# EAGLE board ScoreBoard-V2 (EAGLE 9.4.2)
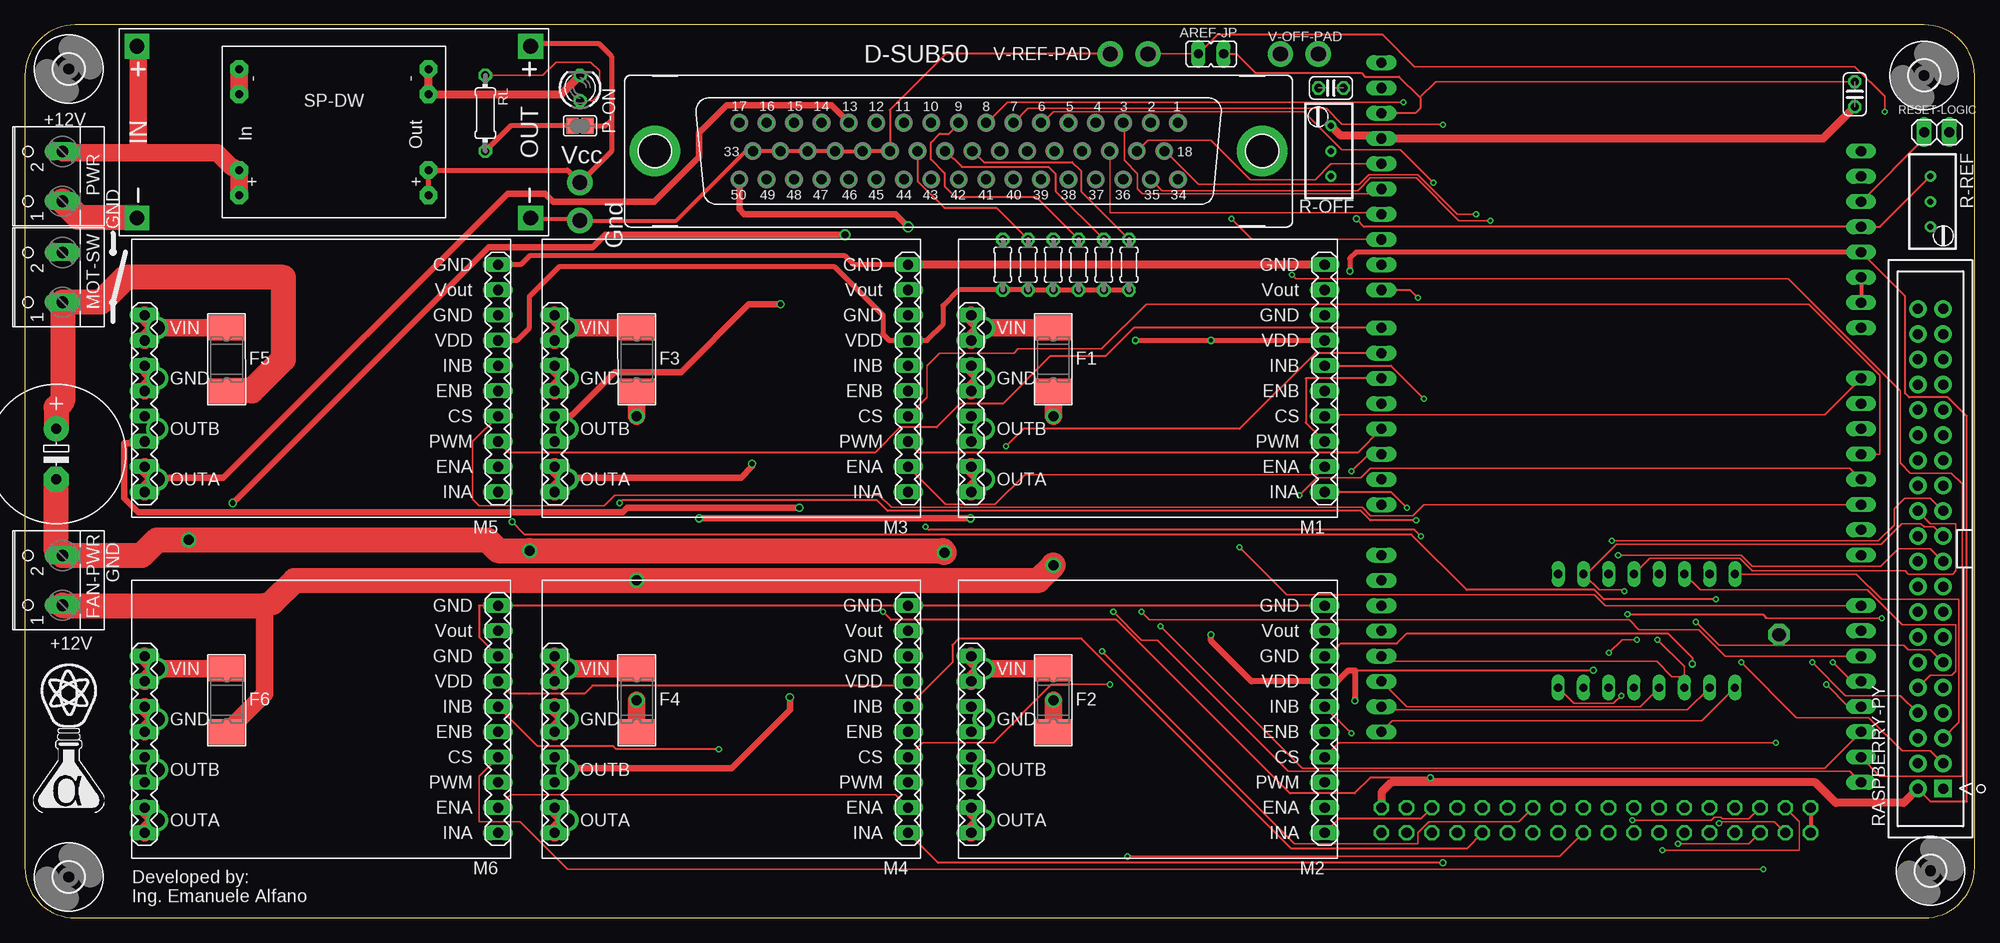
[diagram p0: board, top side]
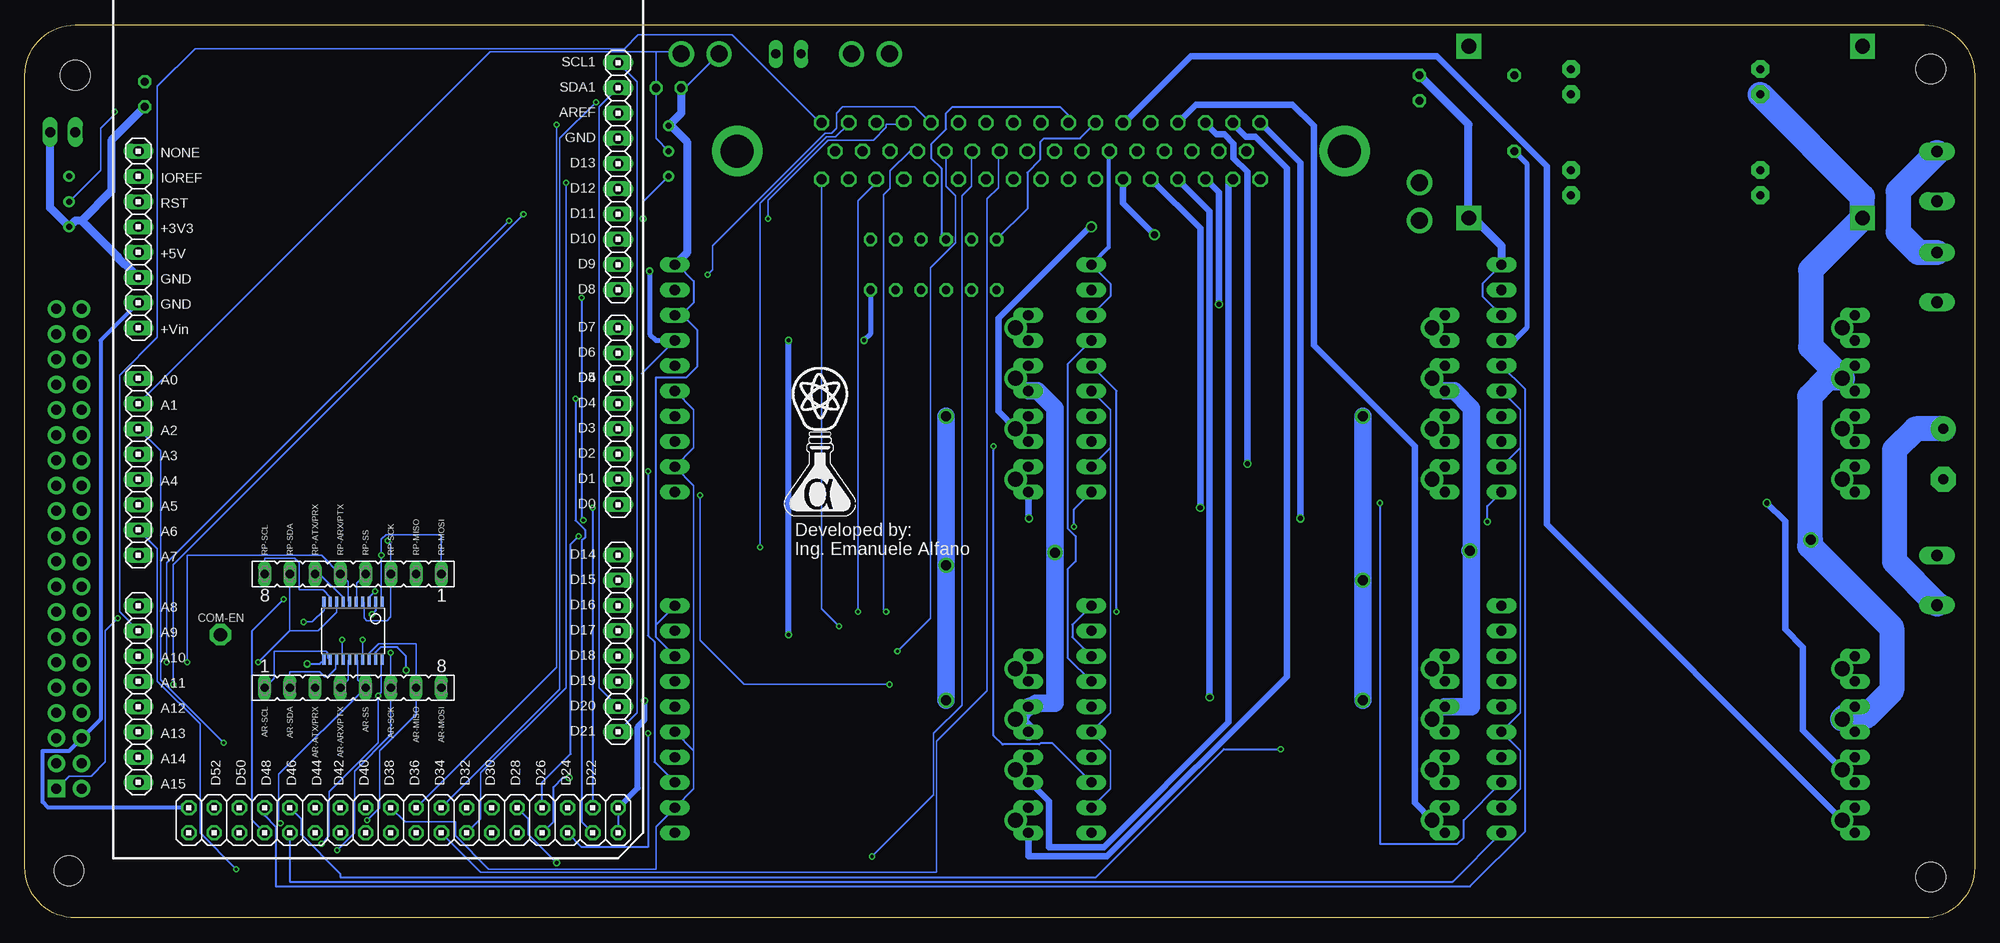
[diagram p1: board, bottom side, seen from below]

Size 196.19 x 89.84 mm. Coordinates in mm from the lower left corner, seen from the top.
Outline: 5.08,0 191.11,0 arc90 196.19,5.08 196.19,84.76 arc90 191.11,89.84 5.08,89.84 arc90 0,84.76 0,5.08 arc90 5.08,0
Copper layers (1*16): Top 0.035mm / dielectric 1.5mm / Bottom 0.035mm
Design rules "SeeedStudio_2layer_DRU_no_angle_20140221": minimum track width 6mil, minimum drill 12mil, track to track 6mil, track to pad 6mil, pad to pad 6mil, via to via 6mil, smd to smd 0mil, copper to edge 10mil, drill to drill 10mil, minimum pad ring 10mil, minimum via ring 6mil, stop-mask expansion 2mil, vias tented up to drill 100mil, thermal gap 10mil
Net classes: 1 PowerJack: width 1.778 mm, drill 1.016 mm, clearance 0.254 mm; 2 PMot: width 0.635 mm, drill 0.508 mm, clearance 0.203 mm; 3 PLogic: width 0.203 mm, drill 0.406 mm, clearance 0.152 mm; 4 Logic: width 0.152 mm

## Footprints (pad centres in the part's own frame; a part is rotated, then mirrored left to right if it is on the bottom)
MEGA-NO-HOLE = drill 1.016 long: +3V3 35.56,2.54; +5V2 38.1,2.54; A0 50.8,2.54; A1 53.34,2.54; A2 55.88,2.54; A3 58.42,2.54; A4 60.96,2.54; A5 63.5,2.54; A6 66.04,2.54; A7 68.58,2.54; A8 73.66,2.54; A9 76.2,2.54; A10 78.74,2.54; A11 81.28,2.54; A12 83.82,2.54; A13 86.36,2.54; A14 88.9,2.54; A15 91.44,2.54; AREF 24.13,50.8; D0 63.5,50.8; D1 60.96,50.8; D2 58.42,50.8; D3 55.88,50.8; D4 53.34,50.8; D5 50.8,50.8; D6 48.26,50.8; D7 45.72,50.8; D8 41.91,50.8; D9 39.37,50.8; D10 36.83,50.8; D11 34.29,50.8; D12 31.75,50.8; D13 29.21,50.8; D14 68.58,50.8; D15 71.12,50.8; D16 73.66,50.8; D17 76.2,50.8; D18 78.74,50.8; D19 81.28,50.8; D20 83.82,50.8; D21 86.36,50.8; GND 26.67,50.8; GND3 40.64,2.54; GND4 43.18,2.54; IOREF 30.48,2.54; NONE 27.94,2.54; RST 33.02,2.54; SCL1 19.05,50.8; SDA1 21.59,50.8; VIN 45.72,2.54 | drill 1.016 octagon: +5V 93.98,50.8; +5V1 96.52,50.8; D22 93.98,48.26; D23 96.52,48.26; D24 93.98,45.72; D25 96.52,45.72; D26 93.98,43.18; D27 96.52,43.18; D28 93.98,40.64; D29 96.52,40.64; D30 93.98,38.1; D31 96.52,38.1; D32 93.98,35.56; D33 96.52,35.56; D34 93.98,33.02; D35 96.52,33.02; D36 93.98,30.48; D37 96.52,30.48; D38 93.98,27.94; D39 96.52,27.94; D40 93.98,25.4; D41 96.52,25.4; D42 93.98,22.86; D43 96.52,22.86; D44 93.98,20.32; D45 96.52,20.32; D46 93.98,17.78; D47 96.52,17.78; D48 93.98,15.24; D49 96.52,15.24; D50 93.98,12.7; D51 96.52,12.7; D52 93.98,10.16; D53 96.52,10.16; GND1 96.52,7.62; GND2 93.98,7.62
JP1 = drill 0.914 long: 1 0,-1.27; 2 0,1.27
E5-13 = drill 1.016 pad 2.54: + -2.54,0 | drill 1.016 pad 2.54 octagon: - 2.54,0
C025-024X044 = drill 0.813 octagon: 1 -1.27,0; 2 1.27,0
P1-13 = drill 1.321 pad 2.159 octagon: TP 0,0
F50VP = drill 1.016 octagon: 1 -22.073,-2.845; 2 -19.329,-2.845; 3 -16.561,-2.845; 4 -13.792,-2.845; 5 -11.049,-2.845; 6 -8.28,-2.845; 7 -5.512,-2.845; 8 -2.769,-2.845; 9 0,-2.845; 10 2.769,-2.845; 11 5.512,-2.845; 12 8.28,-2.845; 13 11.049,-2.845; 14 13.792,-2.845; 15 16.561,-2.845; 16 19.329,-2.845; 17 22.073,-2.845; 18 -20.701,0; 19 -17.932,0; 20 -15.189,0; 21 -12.421,0; 22 -9.652,0; 23 -6.909,0; 24 -4.14,0; 25 -1.372,0; 26 1.372,0; 27 4.14,0; 28 6.909,0; 29 9.652,0; 30 12.421,0; 31 15.189,0; 32 17.932,0; 33 20.701,0; 34 -22.073,2.845; 35 -19.329,2.845; 36 -16.561,2.845; 37 -13.792,2.845; 38 -11.049,2.845; 39 -8.28,2.845; 40 -5.512,2.845; 41 -2.769,2.845; 42 0,2.845; 43 2.769,2.845; 44 5.512,2.845; 45 8.28,2.845; 46 11.049,2.845; 47 13.792,2.845; 48 16.561,2.845; 49 19.329,2.845; 50 22.073,2.845 | drill 3.302 pad 5.08: G1 30.556,0; G2 -30.556,0
BELFUSE0679-3000-12 = smd 2.5 x 3.81: 1 -3.175,0; 2 3.175,0
W237-102 = drill 1.194 long: 1 -2.5,-1.27; 2 2.5,-1.27
3,0 = hole 3: 0,0
VNH5019 = drill 1.016 long: CS -16.51,5.08; ENA -16.51,10.16; ENB -16.51,2.54; GND -16.51,-5.08; GND1 -16.51,-10.16; GND-P2 19.05,0; GND-P3 19.05,2.54; INA -16.51,12.7; INB -16.51,0; OUTA 19.05,10.16; OUTA2 19.05,12.7; OUTB 19.05,5.08; OUTB1 19.05,7.62; PWM -16.51,7.62; VDD -16.51,-2.54; VIN0 19.05,-5.08; VIN1 19.05,-2.54; VOUT -16.51,-7.62 | drill 1.5: GND-P1 17.78,1.27; OUTA3 17.78,11.43; OUTB3 17.78,6.35; VIN2 17.78,-3.81
LED3MM = drill 0.813 octagon: A -1.27,0; K 1.27,0
0204/5 = drill 0.813 octagon: 1 -2.54,0; 2 2.54,0
RTRIMT93YA = drill 0.61: 1 0,-2.54; 2 0,0; 3 0,2.54
RASPI_GPIO_B+_BOX = drill 1 pad 1.778 square: 1 -24.13,-1.27 | drill 1 pad 1.778: 2 -24.13,1.27; 3 -21.59,-1.27; 4 -21.59,1.27; 5 -19.05,-1.27; 6 -19.05,1.27; 7 -16.51,-1.27; 8 -16.51,1.27; 9 -13.97,-1.27; 10 -13.97,1.27; 11 -11.43,-1.27; 12 -11.43,1.27; 13 -8.89,-1.27; 14 -8.89,1.27; 15 -6.35,-1.27; 16 -6.35,1.27; 17 -3.81,-1.27; 18 -3.81,1.27; 19 -1.27,-1.27; 20 -1.27,1.27; 21 1.27,-1.27; 22 1.27,1.27; 23 3.81,-1.27; 24 3.81,1.27; 25 6.35,-1.27; 26 6.35,1.27; 27 8.89,-1.27; 28 8.89,1.27; 29 11.43,-1.27; 30 11.43,1.27; 31 13.97,-1.27; 32 13.97,1.27; 33 16.51,-1.27; 34 16.51,1.27; 35 19.05,-1.27; 36 19.05,1.27; 37 21.59,-1.27; 38 21.59,1.27; 39 24.13,-1.27; 40 24.13,1.27
1X02 = drill 1.016 long: 1 -1.27,0; 2 1.27,0
0204/7 = drill 0.813 octagon: 1 -3.81,0; 2 3.81,0
SJ = smd 1.168 x 1.6: 1 -0.762,0; 2 0.762,0
DC/DC-STEP-DOWN-UNIVERSAL = drill 1.5 pad 2.5 square: IN+ -19.812,8.636; IN- -19.812,-8.636; OUT+ 19.812,8.636; OUT- 19.812,-8.636 | drill 0.8 pad 1.778 octagon: IN+1 -9.525,-6.35; IN+2 -9.525,-3.81; IN-1 -9.525,6.35; IN-2 -9.525,3.81; OUT+1 9.525,-6.35; OUT+2 9.525,-3.81; OUT-1 9.525,6.35; OUT-2 9.525,3.81
FE08 = drill 0.813 long: 1 -8.89,0; 2 -6.35,0; 3 -3.81,0; 4 -1.27,0; 5 1.27,0; 6 3.81,0; 7 6.35,0; 8 8.89,0
TSSOP20 = smd 0.305 x 0.991: 1 -2.925,-2.918; 2 -2.275,-2.918; 3 -1.625,-2.918; 4 -0.975,-2.918; 5 -0.325,-2.918; 6 0.325,-2.918; 7 0.975,-2.918; 8 1.625,-2.918; 9 2.275,-2.918; 10 2.925,-2.918; 11 2.925,2.918; 12 2.275,2.918; 13 1.625,2.918; 14 0.975,2.918; 15 0.325,2.918; 16 -0.325,2.918; 17 -0.975,2.918; 18 -1.625,2.918; 19 -2.275,2.918; 20 -2.925,2.918
P2-38-17 = drill 1.702 pad 2.54: TP-1 -1.905,0; TP-2 1.905,0

## Placement (x,y rotation side)
ARDUINO_MEGA_1  MEGA_ARDUINONO-HOLE  [MEGA-NO-HOLE]  187.3,105.08 270 bottom
AREF-JP  [JP1]  119.36,86.92 90 top
C1  1mF  [E5-13]  3.15,46.66 270 top
C2  1n  [C025-024X044]  184.13,82.86 270 top
C3  1n  [C025-024X044]  131.42,83.49 180 top
COM-EN  PTR1PAD1-13  [P1-13]  176.51,28.5 0 top
D-SUB50  [F50VP]  93.96,77.14 180 top
F1  2410-BOX  [BELFUSE0679-3000-12]  103.48,56.19 270 top
F2  2410-BOX  [BELFUSE0679-3000-12]  103.48,21.89 270 top
F3  2410-BOX  [BELFUSE0679-3000-12]  61.57,56.19 270 top
F4  2410-BOX  [BELFUSE0679-3000-12]  61.57,21.89 270 top
F5  2410-BOX  [BELFUSE0679-3000-12]  20.3,56.19 270 top
F6  2410-BOX  [BELFUSE0679-3000-12]  20.3,21.89 270 top
FAN-PWR  [W237-102]  2.52,33.96 90 top
H1  MOUNT-HOLE3.0  [3,0]  4.43,4.12 180 top
H2  MOUNT-HOLE3.0  [3,0]  4.43,85.4 180 top
H3  MOUNT-HOLE3.0  [3,0]  191.11,84.76 180 top
H4  MOUNT-HOLE3.0  [3,0]  191.75,4.75 0 top
M1  VNH5019  [VNH5019]  114.28,55.55 180 top
M2  VNH5019  [VNH5019]  114.28,21.26 180 top
M3  VNH5019  [VNH5019]  72.37,55.55 180 top
M4  VNH5019  [VNH5019]  72.37,21.26 180 top
M5  VNH5019  [VNH5019]  31.09,55.55 180 top
M6  VNH5019  [VNH5019]  31.09,21.26 180 top
MOT-SW  [W237-102]  2.52,64.44 90 top
P-ON  [LED3MM]  55.86,83.49 90 top
PWR  [W237-102]  2.52,74.6 90 top
R1  39  [0204/5]  98.41,65.71 90 top
R2  39  [0204/5]  100.95,65.71 90 top
R3  39  [0204/5]  103.48,65.71 90 top
R4  39  [0204/5]  108.56,65.71 90 top
R5  39  [0204/5]  106.03,65.71 90 top
R6  39  [0204/5]  111.11,65.71 90 top
R-OFF  5k  [RTRIMT93YA]  131.42,77.14 0 top
R-REF  5k  [RTRIMT93YA]  191.75,72.06 180 top
RASPBERRY-PY  RASPI_GPIO_B+_BOX  [RASPI_GPIO_B+_BOX]  191.75,37.13 90 top
RESET-LOGIC  [1X02]  192.38,79.05 0 top
RL  330  [0204/7]  46.33,80.95 270 top
SJ2  [SJ]  55.86,79.68 180 top
SP-DW  DC/DC-STEP-DOWNGLOB  [DC/DC-STEP-DOWN-UNIVERSAL]  31.09,79.05 0 top
SV1  [FE08]  163.17,34.59 180 bottom
SV2  [FE08]  163.17,23.16 0 bottom
U1  TXB0108  [TSSOP20]  163.17,28.88 180 bottom
U$2  [ALFY_15MM]  4.43,18.09 0 top
U$3  [ALFY_15MM]  116.19,47.93 0 bottom
V-OFF-PAD  TP2P2-38-17  [P2-38-17]  128.25,86.92 180 top
V-REF-PAD  TP2P2-38-17  [P2-38-17]  111.11,86.92 180 top
VTEST-  TP2P2-38-17  [P2-38-17]  55.86,72.06 270 top

## Library data of the parts
ARDUINO_MEGA_1 = ARDUINO_DODO
AREF-JP = jumper
C1-C3 = rcl; SPICEPREFIX: C
COM-EN = testpad
D-SUB50 = con-subd; OC_FARNELL: unknown; OC_NEWARK: unknown
F1-F6 = polyfuse-smd_10
FAN-PWR MOT-SW PWR = con-wago-500; MPN: 237-102; OC_FARNELL: unknown; OC_NEWARK: 70K9898
H1-H4 = holes
M1-M6 = DRIVER POLOLU
P-ON = led
R1-R6 RL = rcl; SPICEPREFIX: R
R-OFF R-REF = rcl; SPICEMODEL: X; SPICEPREFIXL: POT
RASPBERRY-PY = raspberrypi_bastelstube_v13
RESET-LOGIC = pinhead
SJ2 = jumper; SPICEPREFIX: B
SP-DW = diy-modules
SV1 SV2 = con-lsta; OC_FARNELL: unknown; OC_NEWARK: unknown
U1 = TXB0108PWR; AVAILABILITY: Unavailable; DESCRIPTION: 8-Bit Bidirectional Voltage-Level Translator with Auto Direction Sensing and +/-15-kV ESD Protect 20-TSSOP -40 to 85; MF: Texas Instruments; MP: TXB0108PWR; PACKAGE: TSSOP-20 Texas Instruments; PRICE: None
U$2 U$3 = loghi
V-OFF-PAD V-REF-PAD VTEST- = testpad; SPICEPREFIX: X

## Nets
3.3V-ARD [PLogic]: ARDUINO_MEGA_1.+3V3 R-OFF.1 R-REF.1
+3V3: RASPBERRY-PY.1 U1.2
+5V [PLogic]: ARDUINO_MEGA_1.+5V ARDUINO_MEGA_1.+5V1 ARDUINO_MEGA_1.+5V2 M1.VDD M2.VDD M3.VDD M4.VDD M5.VDD M6.VDD R1.1 R2.1 R3.1 R4.1 R5.1 R6.1 RASPBERRY-PY.2 RL.2 SJ2.2 U1.19
AR-ARX/PTX [Logic]: ARDUINO_MEGA_1.D19 SV2.4 U1.15
AR-ATX/PRX [Logic]: ARDUINO_MEGA_1.D18 SV2.3 U1.14
AR-MISO [Logic]: ARDUINO_MEGA_1.D50 SV2.7 U1.18
AR-MOSI [Logic]: ARDUINO_MEGA_1.D51 SV2.8 U1.20
AR-SCK [Logic]: ARDUINO_MEGA_1.D52 SV2.6 U1.17
AR-SCL [Logic]: ARDUINO_MEGA_1.D21 ARDUINO_MEGA_1.SCL1 SV2.1 U1.12
AR-SDA [Logic]: ARDUINO_MEGA_1.D20 ARDUINO_MEGA_1.SDA1 SV2.2 U1.13
AR-SS [Logic]: ARDUINO_MEGA_1.D53 SV2.5 U1.16
CHA1 [Logic]: ARDUINO_MEGA_1.A8 D-SUB50.2
CHA2 [Logic]: ARDUINO_MEGA_1.A9 D-SUB50.1
CHA3 [Logic]: ARDUINO_MEGA_1.A10 D-SUB50.36
CHA4 [Logic]: ARDUINO_MEGA_1.A11 D-SUB50.35
CHA5 [Logic]: ARDUINO_MEGA_1.A12 D-SUB50.18
CHA6 [Logic]: ARDUINO_MEGA_1.A13 D-SUB50.34
CHB1 [Logic]: ARDUINO_MEGA_1.A14 D-SUB50.5
CHB2 [Logic]: ARDUINO_MEGA_1.A15 D-SUB50.21
CHB3 [Logic]: ARDUINO_MEGA_1.D10 D-SUB50.4
CHB4 [Logic]: ARDUINO_MEGA_1.D11 D-SUB50.20
CHB5 [Logic]: ARDUINO_MEGA_1.D12 D-SUB50.3
CHB6 [Logic]: ARDUINO_MEGA_1.D13 D-SUB50.19
COM-ENABLE: COM-EN.TP RASPBERRY-PY.11 U1.10
GND [PLogic]: ARDUINO_MEGA_1.GND ARDUINO_MEGA_1.GND1 ARDUINO_MEGA_1.GND2 ARDUINO_MEGA_1.GND3 ARDUINO_MEGA_1.GND4 C2.2 C3.2 D-SUB50.28 D-SUB50.29 D-SUB50.30 D-SUB50.31 D-SUB50.32 D-SUB50.33 M1.GND M1.GND1 M2.GND M2.GND1 M3.GND M3.GND1 M4.GND M4.GND1 M5.GND M5.GND1 M6.GND M6.GND1 P-ON.K R-OFF.3 R-REF.3 RASPBERRY-PY.6 RESET-LOGIC.2 SP-DW.OUT- SP-DW.OUT-1 SP-DW.OUT-2 U1.11 V-OFF-PAD.TP-2 V-REF-PAD.TP-2 VTEST-.TP-2
GNDA [PowerJack]: C1.- FAN-PWR.2 M1.GND-P1 M1.GND-P2 M1.GND-P3 M2.GND-P1 M2.GND-P2 M2.GND-P3 M3.GND-P1 M3.GND-P2 M3.GND-P3 M4.GND-P1 M4.GND-P2 M4.GND-P3 M5.GND-P1 M5.GND-P2 M5.GND-P3 M6.GND-P1 M6.GND-P2 M6.GND-P3 PWR.1 SP-DW.IN- SP-DW.IN-1 SP-DW.IN-2
IM1V [Logic]: ARDUINO_MEGA_1.A0 M1.CS
IM2V [Logic]: ARDUINO_MEGA_1.A2 M2.CS
IM3V [Logic]: ARDUINO_MEGA_1.A3 M3.CS
IM4V [Logic]: ARDUINO_MEGA_1.A4 M4.CS
IM5V [Logic]: ARDUINO_MEGA_1.A5 M5.CS
IM6V [Logic]: ARDUINO_MEGA_1.A6 M6.CS
IN1A [Logic]: ARDUINO_MEGA_1.D22 M1.INA
IN1B [Logic]: ARDUINO_MEGA_1.D23 M1.INB
IN2A [Logic]: ARDUINO_MEGA_1.D24 M2.INA
IN2B [Logic]: ARDUINO_MEGA_1.D25 M2.INB
IN3A [Logic]: ARDUINO_MEGA_1.D26 M3.INA
IN3B [Logic]: ARDUINO_MEGA_1.D27 M3.INB
IN4A [Logic]: ARDUINO_MEGA_1.D28 M4.INA
IN4B [Logic]: ARDUINO_MEGA_1.D29 M4.INB
IN5A [Logic]: ARDUINO_MEGA_1.D49 M5.INA
IN5B [Logic]: ARDUINO_MEGA_1.D48 M5.INB
IN6A [Logic]: ARDUINO_MEGA_1.D47 M6.INA
IN6B [Logic]: ARDUINO_MEGA_1.D46 M6.INB
M1+ [PMot]: D-SUB50.17 M1.OUTA M1.OUTA2 M1.OUTA3
M1- [PMot]: D-SUB50.50 M1.OUTB M1.OUTB1 M1.OUTB3
M1-FUSE [PowerJack]: F1.1 M1.VIN0 M1.VIN1 M1.VIN2
M2+ [PMot]: D-SUB50.16 M2.OUTA M2.OUTA2 M2.OUTA3
M2- [PMot]: D-SUB50.49 M2.OUTB M2.OUTB1 M2.OUTB3
M2-FUSE [PowerJack]: F2.1 M2.VIN0 M2.VIN1 M2.VIN2
M3+ [PMot]: D-SUB50.15 M3.OUTA M3.OUTA2 M3.OUTA3
M3- [PMot]: D-SUB50.48 M3.OUTB M3.OUTB1 M3.OUTB3
M3-FUSE [PowerJack]: F3.1 M3.VIN0 M3.VIN1 M3.VIN2
M4+ [PMot]: D-SUB50.14 M4.OUTA M4.OUTA2 M4.OUTA3
M4- [PMot]: D-SUB50.47 M4.OUTB M4.OUTB1 M4.OUTB3
M4-FUSE [PowerJack]: F4.1 M4.VIN0 M4.VIN1 M4.VIN2
M5+ [PMot]: D-SUB50.13 M5.OUTA M5.OUTA2 M5.OUTA3
M5- [PMot]: D-SUB50.46 M5.OUTB M5.OUTB1 M5.OUTB3
M5-FUSE [PowerJack]: F5.1 M5.VIN0 M5.VIN1 M5.VIN2
M6+ [PMot]: D-SUB50.12 M6.OUTA M6.OUTA2 M6.OUTA3
M6- [PMot]: D-SUB50.45 M6.OUTB M6.OUTB1 M6.OUTB3
M6-FUSE [PowerJack]: F6.1 M6.VIN0 M6.VIN1 M6.VIN2
MOT-EN [Logic]: ARDUINO_MEGA_1.D38 M1.ENA M1.ENB M2.ENA M2.ENB M3.ENA M3.ENB M4.ENA M4.ENB M5.ENA M5.ENB M6.ENA M6.ENB
MS1 [Logic]: ARDUINO_MEGA_1.D37 D-SUB50.23
MS2 [Logic]: ARDUINO_MEGA_1.D36 D-SUB50.7
MS3 [Logic]: ARDUINO_MEGA_1.D35 D-SUB50.24
MS4 [Logic]: ARDUINO_MEGA_1.D34 D-SUB50.8
MS5 [Logic]: ARDUINO_MEGA_1.D33 D-SUB50.6
MS6 [Logic]: ARDUINO_MEGA_1.D32 D-SUB50.22
N$1: P-ON.A RL.1
N$4 [PLogic]: SJ2.1 SP-DW.OUT+ SP-DW.OUT+1 SP-DW.OUT+2 VTEST-.TP-1
N$5: ARDUINO_MEGA_1.RST RESET-LOGIC.1
PWM1 [Logic]: ARDUINO_MEGA_1.D5 M1.PWM
PWM2 [Logic]: ARDUINO_MEGA_1.D2 M2.PWM
PWM3 [Logic]: ARDUINO_MEGA_1.D3 M3.PWM
PWM4 [Logic]: ARDUINO_MEGA_1.D6 M4.PWM
PWM5 [Logic]: ARDUINO_MEGA_1.D7 M5.PWM
PWM6 [Logic]: ARDUINO_MEGA_1.D8 M6.PWM
RP-ARX/PTX: RASPBERRY-PY.8 SV1.5 U1.6
RP-ATX/PRX: RASPBERRY-PY.10 SV1.6 U1.7
RP-MISO: RASPBERRY-PY.21 SV1.2 U1.3
RP-MOSI: RASPBERRY-PY.19 SV1.1 U1.1
RP-SCK: RASPBERRY-PY.23 SV1.3 U1.4
RP-SCL: RASPBERRY-PY.5 SV1.8 U1.9
RP-SDA: RASPBERRY-PY.3 SV1.7 U1.8
RP-SS: RASPBERRY-PY.24 SV1.4 U1.5
V+ [PowerJack]: MOT-SW.2 PWR.2 SP-DW.IN+ SP-DW.IN+1 SP-DW.IN+2
V-OFF [Logic]: ARDUINO_MEGA_1.A1 C3.1 R-OFF.2 V-OFF-PAD.TP-1
V-REF [Logic]: ARDUINO_MEGA_1.AREF AREF-JP.1 C2.1
V-REF-TRIMM [Logic]: AREF-JP.2 R-REF.2 V-REF-PAD.TP-1
VDD [PowerJack]: C1.+ F1.2 F2.2 F3.2 F4.2 F5.2 F6.2 FAN-PWR.1 MOT-SW.1
VLED1 [PLogic]: D-SUB50.11 R1.2
VLED2 [PLogic]: D-SUB50.27 R2.2
VLED3 [PLogic]: D-SUB50.10 R3.2
VLED4 [PLogic]: D-SUB50.26 R4.2
VLED5 [PLogic]: D-SUB50.9 R5.2
VLED6 [PLogic]: D-SUB50.25 R6.2

## Tracks (layer width: path | path; a pad name or v marks a point on that pad's centre or on a via)
3.3V-ARD  (via drill 0.41)
  Top 0.203: v133.97,70.31 134.76,69.52 ARDUINO_MEGA_1.+3V3 186.67,69.52 R-REF.1
  Bottom 0.203: R-OFF.1 133.97,72.06 v133.97,70.31
+3V3  (via drill 0.3)
  Top 0.152: v186.83,30.15 175.24,30.15 175.11,30.15
  Top 0.203: v161.27,30.53 174.86,30.53 175.24,30.15
  Bottom 0.152: v186.83,30.15 188.1,28.88 188.1,15.7 189.53,14.28 191.75,14.28 RASPBERRY-PY.1 | 160.95,31.74 U1.2
  Bottom 0.203: v161.27,30.53 160.9,30.9 U1.2
+5V  (via drill 0.41)
  Top 0.203: ARDUINO_MEGA_1.+5V2 189.21,62.53 189.21,52.76 189.59,52.38 193.5,52.38 195.4,50.47 195.4,11.73 191.75,11.73 RASPBERRY-PY.2 | M4.VDD 88.44,23.36 57.12,23.36 56.32,22.55 50.8,22.55 50.78,22.53 48.88,22.53 M6.VDD | 133.84,24.91 v157.84,24.91
  Top 0.508: R6.1 R4.1 R5.1 R3.1 R2.1 R1.1 93.96,63.17 92.37,61.58 92.37,59.68 90.79,58.09 M3.VDD 86.98,58.09 86.34,58.73 86.34,60.63 81.42,65.55 53.8,65.55 50.78,62.53 50.78,59.36 49.51,58.09 M5.VDD | v111.74,58.09 v119.36,58.09 M1.VDD | ARDUINO_MEGA_1.+5V2 133.97,66.98 133.33,66.35 v133.33,65.08 | SJ2.2 48.88,79.68 RL.2
  Top 0.61: v133.84,21.86 133.84,24.91 133.17,24.91 132.06,23.8 M2.VDD 123.42,23.8 119.36,27.86 v119.36,28.5
  Top 0.813: RASPBERRY-PY.2 189.05,11.58 182.22,11.58 180.16,13.64 137.52,13.64 136.5,12.62 ARDUINO_MEGA_1.+5V
  Bottom 0.203: ARDUINO_MEGA_1.+5V ARDUINO_MEGA_1.+5V1 | 160.95,25.86 U1.19 160.9,26.71 160.38,27.23 158.73,27.23 157.84,26.34 v157.84,24.91 | M4.VDD 91.26,26.18 91.26,35.07 90.47,35.87 90.47,38.41 91.26,39.2 91.26,55.71 M3.VDD | M1.VDD 134.12,54.76
  Bottom 0.508: M5.VDD 46.33,58.09 45.06,59.36 45.06,75.87 RL.2 | v111.74,58.09 111.11,58.73 R6.1 | v133.33,65.08 133.33,58.73 132.69,58.09 M1.VDD
  Bottom 0.61: ARDUINO_MEGA_1.+5V 134.52,13.08 134.52,19.22 133.84,19.91 v133.84,21.86 | v119.36,28.5 v119.36,58.09
AR-ARX/PTX
  Top 0.152: ARDUINO_MEGA_1.D19 139.04,21.26 162.54,21.26 SV2.4
  Bottom 0.152: SV2.4 163.65,23.96 163.65,25.86 U1.15
AR-ATX/PRX  (via drill 0.3)
  Top 0.152: v164.29,27.99 166.98,25.29 166.98,24.28 | ARDUINO_MEGA_1.D18 137.04,25.8 164.19,25.8 165.72,24.28 166.98,24.28 | 166.98,24.28 SV2.3
  Bottom 0.152: v164.29,27.99 164.29,26.02 U1.14
AR-MISO  (via drill 0.3)
  Top 0.152: ARDUINO_MEGA_1.D50 173.49,9.99 170.79,9.99 170.64,10.15 170,10.15 169.68,9.83 v161.75,9.83
  Bottom 0.152: U1.18 161.56,26.63 160.6,27.58 156.82,27.58 SV2.7 156.82,20.47 160.48,16.81 160.48,11.1 v161.75,9.83
AR-MOSI  (via drill 0.3)
  Top 0.152: v160.63,22.37 159.84,21.58 155.87,21.58 SV2.8 | ARDUINO_MEGA_1.D51 173.49,7.45 v166.35,7.45
  Bottom 0.152: U1.20 160.32,25.86 160.32,22.69 v160.63,22.37 160.63,17.61 165.56,12.69 165.56,8.24 v166.35,7.45
AR-SCK  (via drill 0.3)
  Top 0.152: ARDUINO_MEGA_1.D52 178.57,9.67 178.57,6.81 v164.76,6.81 | v162.19,27.99 160.73,27.99 v159.4,26.66
  Bottom 0.152: v162.19,27.99 U1.17 | v159.4,26.66 159.36,26.63 SV2.6 159.36,18.4 163.02,14.75 163.02,8.56 v164.76,6.81
AR-SCL
  Top 0.152: ARDUINO_MEGA_1.D21 137.62,19.83 168.73,19.83 SV2.1
  Bottom 0.152: SV2.1 171.11,24.12 171.11,26.82 165.87,26.82 165.72,26.66 165.72,26.18 165.56,26.02 U1.12 | ARDUINO_MEGA_1.SCL1 134.6,84.12 134.6,20.62 ARDUINO_MEGA_1.D21
AR-SDA
  Top 0.152: ARDUINO_MEGA_1.D20 136.82,20.94 167.3,20.94 SV2.2
  Bottom 0.152: SV2.2 169.52,24.75 166.51,24.75 166.03,24.28 165.72,24.28 164.92,25.07 164.92,25.86 U1.13 | ARDUINO_MEGA_1.SDA1 138.41,81.59 138.41,23.16 ARDUINO_MEGA_1.D20
AR-SS  (via drill 0.3)
  Top 0.152: ARDUINO_MEGA_1.D53 176.03,9.67 170.64,9.67 v170.48,9.51
  Bottom 0.152: U1.16 162.7,25.86 162.7,23.96 SV2.5 170.64,14.43 170.64,9.67 v170.48,9.51
CHA1  (via drill 0.3)
  Top 0.152: v122.22,37.29 126.98,32.53 157.94,32.53 159.05,31.42 ARDUINO_MEGA_1.A8
  Bottom 0.152: v122.22,37.29 122.22,71.9 115.55,78.57 114.6,78.57 113.33,79.84 D-SUB50.2
CHA2
  Bottom 0.152: ARDUINO_MEGA_1.A9 186.67,30.79 186.67,54.6 182.86,58.41 182.86,83.65 179.05,87.46 135.87,87.46 134.5,88.82 125.01,88.82 116.19,80 D-SUB50.1
CHA3  (via drill 0.3)
  Top 0.152: v112.38,30.79 113.17,29.99 161.43,29.99 162.41,29.01 168.44,29.01 171.11,26.34 ARDUINO_MEGA_1.A10
  Bottom 0.152: D-SUB50.36 110.52,74.01 112.38,72.16 v112.38,30.79
CHA4  (via drill 0.3)
  Top 0.152: v147.46,70.16 144.28,70.16 140,74.44 135.39,74.44 134.12,73.17 114.44,73.17 113.33,74.28 D-SUB50.35 | v181.91,25.7 183.81,23.8 ARDUINO_MEGA_1.A11
  Bottom 0.152: v147.46,70.16 181.91,35.71 v181.91,25.7
CHA5  (via drill 0.3)
  Top 0.152: v146.03,70.79 144.12,70.79 140.16,74.76 135.23,74.76 134.28,73.81 118.09,73.81 114.76,77.14 D-SUB50.18 | v181.27,23.48 183.49,21.26 ARDUINO_MEGA_1.A12
  Bottom 0.152: v146.03,70.79 181.27,35.55 v181.27,23.48
CHA6  (via drill 0.3)
  Top 0.152: v114.28,29.36 128.57,15.07 181.11,15.07 ARDUINO_MEGA_1.A13
  Bottom 0.152: v114.28,29.36 116.03,31.1 116.03,74.28 D-SUB50.34
CHB1  (via drill 0.3)
  Top 0.152: v127.49,64.69 127.9,64.28 177.46,64.28 188.7,53.04 188.7,45.77 189.72,44.76 193.84,44.76 194.92,43.68 194.92,14.28 186.67,14.28 ARDUINO_MEGA_1.A14
  Bottom 0.152: v127.49,64.69 126.98,65.2 126.98,67.62 115.68,78.92 115.04,78.92 114.53,79.43 114.53,80.95 113.9,81.59 106.66,81.59 105.07,80 D-SUB50.5
CHB2  (via drill 0.3)
  Top 0.152: v109.52,30.79 112.38,27.93 113.96,27.93 127.14,14.75 183.65,14.75 ARDUINO_MEGA_1.A15
  Bottom 0.152: D-SUB50.21 107.14,77.14 109.12,75.16 109.12,73.41 109.77,72.76 109.77,31.04 v109.52,30.79
CHB3  (via drill 0.3)
  Top 0.152: v121.42,70.31 123.49,68.25 ARDUINO_MEGA_1.D10
  Bottom 0.152: v121.42,70.31 121.42,72.22 115.39,78.25 110.79,78.25 109.52,79.52 109.52,79.84 107.77,79.84 D-SUB50.4
CHB4
  Top 0.152: ARDUINO_MEGA_1.D11 136.35,70.95 109.2,70.95 109.2,77.14 D-SUB50.20
CHB5
  Top 0.152: ARDUINO_MEGA_1.D12 136.03,72.85 112.44,72.85 111.96,73.33 111.96,74.89 110.63,76.22 110.63,79.84 D-SUB50.3
CHB6
  Top 0.152: ARDUINO_MEGA_1.D13 131.42,75.87 129.84,74.28 123.33,74.28 119.36,78.25 113.01,78.25 D-SUB50.19
COM-ENABLE  (via drill 0.3)
  Top 0.152: 176.51,27.45 189.05,27.45 189.53,26.97 191.75,26.97 RASPBERRY-PY.11 | 176.51,27.45 170.48,27.45 v168.16,29.77 | COM-EN.TP 176.51,27.45
  Bottom 0.152: v168.16,29.77 167.27,29.77 166.1,30.94 U1.10
GND  (via drill 0.41)
  Top 0.203: 50.94,70.31 SP-DW.OUT- | M6.GND 45.7,28.25 45.7,31.42 M6.GND1 M4.GND1 M2.GND1 | v167.78,25.55 167.78,26.18 165.33,28.63 139.08,28.63 138.07,27.61 132.44,27.61 131.17,26.34 M2.GND | D-SUB50.28 87.05,81.28 92.69,86.92 V-REF-PAD.TP-2
  Top 0.406: ARDUINO_MEGA_1.GND2 ARDUINO_MEGA_1.GND1 | ARDUINO_MEGA_1.GND3 ARDUINO_MEGA_1.GND4 | D-SUB50.28 D-SUB50.29 D-SUB50.30 D-SUB50.31 D-SUB50.32 D-SUB50.33 72.53,77.14 65.54,70.16 VTEST-.TP-2 55.7,70.31 50.94,70.31
  Top 0.508: M3.GND1 83.42,65.71 82.53,66.6 50.78,66.6 49.89,65.71 M5.GND1
  Top 0.813: P-ON.K 53.95,82.86 SP-DW.OUT-2 SP-DW.OUT-1 | R-OFF.3 132.38,78.73 136.19,78.73 ARDUINO_MEGA_1.GND 180.95,78.41 C2.2 | M1.GND1 M3.GND1
  Bottom 0.203: M3.GND 86.98,62.53 86.98,63.8 M3.GND1 | M5.GND 49.51,62.53 49.51,63.8 M5.GND1 | 50.94,70.47 SP-DW.OUT- | M4.GND 90.79,28.25 90.79,29.52 M4.GND1 | 130.16,60.63 128.88,61.9 128.88,64.06 130.54,65.71 | v167.78,25.55 166.52,25.55 U1.11 | 132.69,29.52 M2.GND1 | 132.69,29.52 132.69,28.25 M2.GND | M1.GND 130.03,60.63 128.5,59.11 128.5,55.49 129.61,54.38 132.69,54.38 132.69,29.52 | V-OFF-PAD.TP-2 129.77,83.49 C3.2
  Bottom 0.406: ARDUINO_MEGA_1.GND2 193.84,11.1 194.42,11.67 194.42,16.81 191.75,16.81 RASPBERRY-PY.6 188.57,19.99 188.57,58.09 ARDUINO_MEGA_1.GND4 | M3.GND1 87.13,67.46 87.13,77.14 D-SUB50.28 | 130.16,60.63 M1.GND | M1.GND1 130.54,65.71
  Bottom 0.813: M5.GND1 47.6,67.62 50.4,70.41 SP-DW.OUT- | P-ON.K 50.94,79.84 50.94,70.47 | C3.2 130.16,80.95 R-OFF.3 131.17,79.68 129.52,78.03 129.52,66.98 M1.GND1 | ARDUINO_MEGA_1.GND3 185.98,65.66 186.07,65.66 186.85,66.43 186.85,66.52 190.48,70.16 | C2.2 187.5,78.22 187.5,73.14 190.48,70.16 | RESET-LOGIC.2 193.66,71.43 R-REF.3 191.11,70.16 190.48,70.16
GNDA  (via drill 1.02)
  Top 1.778: M1.GND-P3 M1.GND-P1 96.02,54.91 95.87,54.91 M1.GND-P2 | M4.GND-P3 M4.GND-P1 54.11,20.62 53.95,20.62 M4.GND-P2 | M3.GND-P3 M3.GND-P1 54.11,54.91 53.95,54.91 M3.GND-P2 | SP-DW.IN-1 SP-DW.IN-2 | 11.25,70.47 SP-DW.IN- | M6.GND-P3 M6.GND-P1 12.84,20.62 12.68,20.62 M6.GND-P2 | M5.GND-P3 M5.GND-P1 12.84,54.91 12.68,54.91 M5.GND-P2
  Top 2.54: C1.- 3.15,37.09 FAN-PWR.2 11.75,36.46 13.32,38.02 v16.49,38.02 46.53,38.02 47.62,36.94 v50.78,36.94 92.35,36.94 v92.53,36.75 | PWR.1 5.42,70.47 11.25,70.47
  Bottom 1.778: M2.GND-P3 M2.GND-P1 95.87,20.47 95.87,20.62 M2.GND-P2 94.44,21.58 92.53,21.58 v92.53,36.75 92.53,51.26 94.28,53.01 M1.GND-P3 | M4.GND-P2 50.62,21.26 50.62,36.75 | M3.GND-P3 52.37,53.01 50.62,51.26 50.62,36.75 | 50.62,36.75 50.78,36.91 v50.78,36.94
  Bottom 2.54: SP-DW.IN-2 11.28,72.57 SP-DW.IN- 16.49,65.2 16.49,57.45 M5.GND-P1 14.77,54.28 16.6,52.45 16.6,37.43 16.49,37.32 | M6.GND-P1 13.06,20.24 10.97,20.24 8.36,22.85 8.36,29.19 16.49,37.32 | 16.49,37.32 v16.49,38.02
IM1V
  Top 0.152: M1.CS 130.95,50.63 181.11,50.63 ARDUINO_MEGA_1.A0
IM2V  (via drill 0.3)
  Top 0.152: M2.CS 132.22,17.61 v176.19,17.61
  Bottom 0.152: v176.19,17.61 182.54,23.96 182.54,46.98 ARDUINO_MEGA_1.A2
IM3V
  Top 0.152: M3.CS 90.79,52.38 90.79,55.55 92.06,56.82 99.52,56.82 99.93,57.23 108.34,57.23 112.85,61.74 179.53,61.74 186.67,54.6 186.67,46.66 ARDUINO_MEGA_1.A3
IM4V  (via drill 0.3)
  Top 0.152: M4.CS 90.31,17.61 97.45,17.61 103.33,23.48 v109.2,23.48 | v128.25,42.53 130,44.28 134.44,44.28 135.39,45.23 183.65,45.23 ARDUINO_MEGA_1.A4
  Bottom 0.152: v128.25,42.53 128.25,27.93 123.81,23.48 v109.2,23.48
IM5V
  Top 0.152: M5.CS 45.06,47.93 45.06,42.12 45.7,41.48 58.27,41.48 59.32,42.53 85.96,42.53 87.2,41.29 134.57,41.29 135.39,40.47 139.68,40.47 140.79,41.58 ARDUINO_MEGA_1.A5
IM6V  (via drill 0.3)
  Top 0.152: M6.CS 45.7,14.28 45.7,9.67 49.83,9.67 54.59,4.91 v174.92,4.91
  Bottom 0.152: v174.92,4.91 178.57,8.56 178.57,19.51 182.86,23.8 182.86,37.13 ARDUINO_MEGA_1.A6
IN1A  (via drill 0.3)
  Top 0.203: v139.04,41.26 137.46,42.85 M1.INA
  Bottom 0.203: v139.04,41.26 ARDUINO_MEGA_1.D22
IN1B  (via drill 0.3)
  Top 0.203: v140.79,52.22 137.46,55.55 M1.INB
  Bottom 0.203: ARDUINO_MEGA_1.D23 140.16,9.67 140.16,37.93 139.84,38.25 139.84,39.04 140.79,39.99 v140.79,52.22
IN2A
  Top 0.203: M2.INA 132.22,9.99 140.47,9.99 ARDUINO_MEGA_1.D24
IN2B  (via drill 0.3)
  Top 0.203: M2.INB v133.49,18.56
  Bottom 0.203: ARDUINO_MEGA_1.D25 140.16,7.13 133.49,7.13 v133.49,18.56
IN3A  (via drill 0.3)
  Top 0.203: v90.63,39.36 90.94,39.04 139.84,39.04 v140.47,38.41
  Bottom 0.203: M3.INA 90.63,41.1 v90.63,39.36 | v140.47,38.41 141.27,37.61 141.27,16.5 144.12,13.64 ARDUINO_MEGA_1.D26
IN3B  (via drill 0.3, 0.41)
  Top 0.203: v86.34,30.79 87.13,29.99 109.84,29.99 127.3,12.53 133.81,12.53 135.39,14.12 v141.43,14.12
  Bottom 0.203: M3.INB 86.34,53.01 v86.34,30.79 | v141.43,14.12 142.06,14.12 143.01,13.16 143.01,9.67 ARDUINO_MEGA_1.D27
IN4A  (via drill 0.41)
  Top 0.203: M4.INA 91.9,5.54 v142.7,5.54
  Bottom 0.203: v142.7,5.54 145.55,8.4 145.55,9.99 ARDUINO_MEGA_1.D28
IN4B
  Top 0.203: M4.INB 93.33,25.7 93.33,27.45 93.96,28.09 106.34,28.09 127.46,6.97 145.08,6.97 ARDUINO_MEGA_1.D29
IN5A  (via drill 0.3, 0.41)
  Top 0.203: v49.03,39.83 50.3,38.56 139.52,38.56 145.08,33.01 157.94,33.01 158.89,32.05 v170.16,32.05
  Bottom 0.203: M5.INA 49.03,41.42 v49.03,39.83 | v170.16,32.05 173.33,28.88 173.33,9.83 ARDUINO_MEGA_1.D49
IN5B
  Bottom 0.203: M5.INB 45.22,53.17 45.22,8.72 50.78,3.16 170.95,3.16 170.95,9.2 172.06,10.31 ARDUINO_MEGA_1.D48
IN6A
  Bottom 0.203: M6.INA 52.53,3.64 169.52,3.64 ARDUINO_MEGA_1.D47
IN6B  (via drill 0.3)
  Top 0.203: M6.INB 51.57,17.29 59.19,17.29 59.51,16.97 v69.83,16.97
  Bottom 0.203: v69.83,16.97 75.55,16.97 88.4,4.12 164.44,4.12 164.44,4.43 168.41,8.4 168.41,9.99 ARDUINO_MEGA_1.D46
M1+  (via drill 0.51)
  Top 0.635: v95.14,40.18 v67.86,40.18
  Top 1.778: M1.OUTA2 M1.OUTA3 M1.OUTA
  Bottom 0.635: v67.86,40.18 67.86,75.97 71.73,79.84 D-SUB50.17 | M1.OUTA2 95.23,40.28 v95.14,40.18
M1-  (via drill 0.75)
  Top 0.635: D-SUB50.50 71.89,74.44 71.89,71.27 72.37,70.79 87.61,70.79 v88.88,69.52
  Bottom 0.635: M1.OUTB3 98.25,50.95 98.25,60.31 89.04,69.52 v88.88,69.52 | M1.OUTB3 M1.OUTB1 | M1.OUTB3 M1.OUTB
M1-FUSE
  Top 1.778: M1.VIN2 M1.VIN1 | M1.VIN2 M1.VIN0 | M1.VIN2 F1.1
M2+
  Top 1.778: M2.OUTA2 M2.OUTA3 M2.OUTA
  Bottom 0.635: M2.OUTA2 95.23,6.18 87.29,6.18 69.2,24.28 69.2,75.39 72.37,78.57 73.32,78.57 74.59,79.84 D-SUB50.16
M2-
  Top 0.635: M2.OUTB3 M2.OUTB
  Bottom 0.635: D-SUB50.49 74.75,74.28 75.07,73.97 75.07,19.67 87.61,7.13 93.17,7.13 93.17,11.73 95.07,13.64 M2.OUTB1 M2.OUTB3
M2-FUSE
  Top 1.778: M2.VIN2 M2.VIN1 | M2.VIN2 M2.VIN0 | M2.VIN2 F2.1
M3+  (via drill 0.51)
  Top 0.635: M3.OUTA3 54.75,44.28 72.05,44.28 73.2,45.42 v73.2,45.68
  Top 1.778: M3.OUTA2 M3.OUTA3 M3.OUTA
  Bottom 0.635: v73.2,45.68 73.2,75.05 74.59,76.44 74.59,77.9 75.51,78.82 76.28,78.82 77.29,79.84 D-SUB50.15
M3-  (via drill 0.51)
  Top 0.635: M3.OUTB1 M3.OUTB3 M3.OUTB 54.27,49.84 59.35,54.91 66.02,54.91 72.85,61.74 v76.02,61.74
  Bottom 0.635: v76.02,61.74 76.02,73.01 77.29,74.28 D-SUB50.48
M3-FUSE
  Top 1.778: M3.VIN2 M3.VIN1 | M3.VIN2 M3.VIN0 | M3.VIN2 F3.1
M4+
  Top 1.778: M4.OUTA2 M4.OUTA3 M4.OUTA
  Bottom 0.635: M4.OUTA3 56.34,11.58 56.34,47.45 66.5,57.61 66.5,79.68 68.62,81.81 78.34,81.81 80.15,80 D-SUB50.14
M4-  (via drill 0.51)
  Top 0.635: M4.OUTB3 M4.OUTB1 | M4.OUTB3 M4.OUTB | M4.OUTB3 54.75,15.07 71.1,15.07 76.97,20.94 v76.97,22.21
  Bottom 0.635: v76.97,22.21 76.97,71.11 80.15,74.28 D-SUB50.47
M4-FUSE
  Top 1.778: M4.VIN2 M4.VIN1 | M4.VIN2 M4.VIN0 | F4.1 M4.VIN2
M5+
  Top 0.635: D-SUB50.13 81.15,81.74 70.62,81.74 67.85,78.97 67.85,76.58 63.32,72.06 53.16,72.06 52.37,72.85 48.56,72.85 19.98,44.28 13.47,44.28 M5.OUTA3
  Top 1.778: M5.OUTA2 M5.OUTA3 M5.OUTA
M5-  (via drill 0.51)
  Top 0.635: M5.OUTB M5.OUTB3 M5.OUTB1 11.89,47.77 9.98,47.77 9.98,42.21 11.41,40.79 60.15,40.79 60.62,41.26 v77.93,41.26
  Bottom 0.635: v77.93,41.26 77.93,69.36 82.85,74.28 D-SUB50.46
M5-FUSE
  Top 1.778: M5.VIN2 M5.VIN1 | M5.VIN2 M5.VIN0 | M5.VIN2 F5.1
M6+
  Top 1.778: M6.OUTA2 M6.OUTA3 M6.OUTA
  Bottom 0.635: M6.OUTA3 43.06,39.58 43.06,75.62 54.11,86.67 78.88,86.67 85.55,80 D-SUB50.12
M6-  (via drill 0.51, 0.75)
  Top 0.635: M6.OUTB1 M6.OUTB3 M6.OUTB | v82.53,68.73 58.4,68.73 57.13,67.46 46.65,67.46 v20.93,41.74
  Bottom 0.635: v20.93,41.74 19.08,39.88 19.08,29.02 17.28,27.23 17.28,18.88 M6.OUTB3 | v82.53,68.73 85.68,71.88 D-SUB50.45
M6-FUSE
  Top 1.778: M6.VIN2 M6.VIN1 | M6.VIN2 M6.VIN0 | M6.VIN2 F6.1
MOT-EN
  Top 0.152: M1.ENA 130,44.6 100.63,44.6 97.64,41.61 92.66,41.61 M3.ENA | M6.ENA 48.88,12.37 87.61,12.37 M4.ENA
  Bottom 0.152: M1.ENB 128.88,51.1 128.88,47.3 M1.ENA 128.88,43.48 128.88,16.81 | 128.88,16.81 128.88,13 M2.ENA 132.69,9.2 132.69,4.91 149.52,4.91 152.86,8.24 152.86,9.67 157.94,9.67 ARDUINO_MEGA_1.D38 | M2.ENB 128.88,16.81 | M6.ENA 45.7,13 45.7,16.81 M6.ENB 45.7,20.62 45.7,47.3 | 45.7,47.3 M5.ENA | 45.7,47.3 45.7,51.1 M5.ENB | M4.ENA 86.98,13 86.98,16.81 M4.ENB 86.98,20.62 86.98,47.3 | 86.98,47.3 M3.ENA | 86.98,47.3 86.98,51.1 M3.ENB
MS1  (via drill 0.3)
  Top 0.152: ARDUINO_MEGA_1.D37 154.44,6.18 v110.95,6.18
  Bottom 0.152: v110.95,6.18 104.76,12.37 104.76,18.56 101.9,21.42 101.9,72.66 100.95,73.62 100.95,77.14 D-SUB50.23
MS2  (via drill 0.3)
  Top 0.152: v142.7,79.81 142.7,79.84 132.54,79.84 130.95,81.43 100.95,81.43 99.52,80 D-SUB50.7
  Bottom 0.152: ARDUINO_MEGA_1.D36 142.7,25.23 v142.7,79.81
MS3
  Bottom 0.152: ARDUINO_MEGA_1.D35 150.32,4.59 104.44,4.59 104.44,17.77 99.36,22.85 99.36,72.35 98.25,73.46 98.25,77.14 D-SUB50.24
MS4  (via drill 0.3)
  Top 0.152: v138.73,82.06 98.88,82.06 96.82,80 D-SUB50.8
  Bottom 0.152: ARDUINO_MEGA_1.D34 142.38,23.01 142.38,78.41 v138.73,82.06
MS5  (via drill 0.3)
  Top 0.152: v141.74,73.97 138.41,77.3 132.54,77.3 128.73,81.11 103.48,81.11 102.37,80 D-SUB50.6
  Bottom 0.152: ARDUINO_MEGA_1.D33 150.32,9.99 150.32,14.59 141.74,23.16 v141.74,73.97
MS6  (via drill 0.3)
  Top 0.152: ARDUINO_MEGA_1.D32 150.32,9.67 141.27,9.67 140.16,8.56 140.16,7.45 127.77,7.45 v108.41,26.82
  Bottom 0.152: v108.41,26.82 105.07,30.15 105.07,65.39 102.53,67.93 102.53,72.66 103.48,73.62 103.48,77.14 D-SUB50.22
N$1
  Top 0.152: P-ON.A 57.13,82.22 57.83,82.92 57.83,85.21 56.94,86.09 53.45,86.09 52.11,84.76 RL.1
N$4
  Top 0.508: 59.03,80.32 59.03,86.67 57.76,87.94 51.16,87.94 SP-DW.OUT+ | 59.03,80.32 59.03,77.14 VTEST-.TP-1 54.59,75.24 SP-DW.OUT+2 SP-DW.OUT+1 | SJ2.1 58.4,79.68 59.03,80.32
N$5
  Top 0.152: ARDUINO_MEGA_1.RST 191.11,78.41 RESET-LOGIC.1
PWM1
  Top 0.203: M1.PWM 128.88,49.84 128.88,54.28 ARDUINO_MEGA_1.D5
PWM2  (via drill 0.3)
  Top 0.203: v133.49,44.91 135.23,46.66 ARDUINO_MEGA_1.D2
  Bottom 0.203: M2.PWM 132.85,15.7 132.85,27.77 133.49,28.4 v133.49,44.91
PWM3
  Top 0.203: M3.PWM 89.99,46.82 134.12,46.82 ARDUINO_MEGA_1.D3
PWM4  (via drill 0.3)
  Top 0.203: v98.72,47.45 100.47,49.2 122.22,49.2 129.84,56.82 ARDUINO_MEGA_1.D6
  Bottom 0.203: M4.PWM 92.85,17.61 93.96,17.61 94.12,17.45 97.77,17.45 97.83,17.45 98.72,18.34 v98.72,47.45
PWM5
  Top 0.203: M5.PWM 48.72,46.82 85.55,46.82 88.09,49.36 91.74,49.36 94.12,51.74 98.41,51.74 103.17,56.5 108.72,56.5 111.58,59.36 ARDUINO_MEGA_1.D7
PWM6  (via drill 0.3)
  Top 0.203: v59.83,41.74 60.11,42.02 85.74,42.02 86.82,40.95 134.44,40.95 135.39,39.99 v140,39.99 | v140.16,62.38 139.36,63.17 ARDUINO_MEGA_1.D8
  Bottom 0.203: M6.PWM 51.41,9.83 51.41,8.08 52.05,7.45 59.83,7.45 v59.83,41.74 | v140,39.99 140.16,40.15 v140.16,62.38
RP-ARX/PTX  (via drill 0.3)
  Top 0.152: v179.84,25.7 183.18,22.37 188.73,22.37 RASPBERRY-PY.8
  Bottom 0.152: U1.6 163.65,31.9 163.65,33.8 SV1.5 166.35,36.5 179.84,36.5 v179.84,25.7
RP-ATX/PRX
  Top 0.152: RASPBERRY-PY.10 191.75,24.43 193.91,24.43 194.29,24.82 194.29,29.52 188.89,29.52 185.4,33.01 168.57,33.01 SV1.6
  Bottom 0.152: SV1.6 166.51,34.59 164.16,32.25 U1.7
RP-MISO  (via drill 0.3)
  Top 0.152: v160.95,32.85 160.79,33.01 158.41,33.01 156.98,34.44 | RASPBERRY-PY.21 192.07,39.36 191.11,39.36 190.8,39.67 188.86,39.67 186.8,37.61 160.16,37.61 156.98,34.44 | 156.98,34.44 SV1.2
  Bottom 0.152: U1.3 161.56,32.25 v160.95,32.85
RP-MOSI  (via drill 0.3)
  Top 0.152: RASPBERRY-PY.19 191.75,37.13 188.51,37.13 186.76,35.39 173.81,35.39 172.7,36.5 v160.32,36.5
  Bottom 0.152: SV1.1 154.28,38.56 159.84,38.56 160.32,38.09 v160.32,36.5 160.32,31.9 U1.1
RP-SCK  (via drill 0.3)
  Top 0.152: RASPBERRY-PY.23 191.75,42.21 189.15,42.21 188.09,41.15 188.09,39.51 186.51,37.93 v159.68,37.93
  Bottom 0.152: U1.4 162.06,31.74 162.06,30.18 161.78,29.9 159.75,29.9 159.36,30.28 SV1.3 159.36,37.61 v159.68,37.93
RP-SCL
  Top 0.152: RASPBERRY-PY.5 194.61,19.67 194.61,32.05 186.83,32.05 184.29,34.59 SV1.8
  Bottom 0.152: SV1.8 172.06,36.18 169.05,36.18 168.57,35.71 168.57,33.01 166.19,33.01 165.46,32.28 165.46,31.81 U1.9
RP-SDA  (via drill 0.3)
  Top 0.152: RASPBERRY-PY.3 191.75,16.81 188.89,16.81 185.56,20.15 178.26,20.15 v172.7,25.7
  Bottom 0.152: U1.8 164.79,30.75 166.67,28.88 169.52,28.88 | SV1.7 169.52,28.88 | 169.52,28.88 v172.7,25.7
RP-SS
  Top 0.152: SV1.4 163.49,36.18 172.54,36.18 173.81,34.91 189.21,34.91 189.53,34.59 193.97,34.59 194.29,34.91 194.29,39.67 191.75,39.67 RASPBERRY-PY.24
  Bottom 0.152: SV1.4 162.83,33.67 162.83,31.81 U1.5
V+
  Top 1.778: SP-DW.IN+1 SP-DW.IN+2 20.78,75.55 19.35,76.98 11.41,76.98 | 11.41,76.98 3.79,76.98 PWR.2 | 11.41,76.98 11.41,87.62 SP-DW.IN+
  Bottom 1.778: 3.79,76.98 PWR.2
  Bottom 2.54: 3.79,76.98 7.7,73.08 7.7,68.98 5.66,66.94 MOT-SW.2
V-OFF
  Bottom 0.152: ARDUINO_MEGA_1.A1 149.36,87.14 132.69,87.14 | R-OFF.2 132.69,78.41 C3.1 132.69,87.14 | V-OFF-PAD.TP-1 130.38,87.14 132.69,87.14
V-REF
  Top 0.152: C2.1 141.97,84.12 140.38,82.54
  Top 0.203: AREF-JP.1 121.9,86.92 123.81,85.01 134.47,85.01 134.85,84.63 138.28,84.63 140.38,82.54 140.44,82.47 140.44,81.46 139.93,80.95 ARDUINO_MEGA_1.AREF
V-REF-TRIMM  (via drill 0.3)
  Top 0.152: V-REF-PAD.TP-1 AREF-JP.2 | 139.81,85.65 184.13,85.65 187.15,82.63 v187.15,81.11
  Top 0.203: 139.81,85.65 136.63,88.82 120,88.82 AREF-JP.2
  Bottom 0.152: R-REF.2 188.57,75.24 188.57,79.43 187.15,80.86 v187.15,81.11
VDD  (via drill 1.02)
  Top 1.778: v103.48,21.89 F2.2 | F6.2 24.11,22.53 24.11,31.42 24.9,31.74 | F1.2 v103.48,50.47 | F3.2 v61.57,50.47 | F4.2 v61.57,21.89
  Top 2.54: 24.11,31.42 3.79,31.42 FAN-PWR.1 | F5.2 22.84,53.01 26.02,56.19 26.02,64.44 10.14,64.44 7.64,61.94 MOT-SW.1 3.79,51.99 3.15,51.36 C1.+ | 24.9,31.74 27.13,33.96 v61.57,33.96 101.96,33.96 v103.48,35.48
  Bottom 1.778: v103.48,50.47 v103.48,35.48 v103.48,21.89 | v61.57,21.89 v61.57,33.96 v61.57,50.47 | 3.79,31.58 FAN-PWR.1
  Bottom 2.54: 3.79,31.58 8.08,35.87 8.08,47.07 5.95,49.2 C1.+
VLED1
  Bottom 0.203: R1.2 95.33,71.33 95.33,74.98 94.02,76.28 94.02,78.03 93.64,78.41 90.02,78.41 D-SUB50.11
VLED2
  Top 0.203: R2.2 97.77,71.43 92.53,71.43 89.83,74.12 89.83,77.14 D-SUB50.27
VLED3
  Bottom 0.203: R3.2 103.96,68.73 103.96,75.39 105.01,76.44 105.01,77.84 103.48,79.36 103.48,80.95 102.85,81.59 92.06,81.59 91.19,80.72 D-SUB50.10
VLED4
  Top 0.203: R4.2 103.71,73.11 103.71,74.85 103.01,75.55 94.28,75.55 92.69,77.14 D-SUB50.26
VLED5
  Top 0.203: R5.2 101.74,72.54 93.61,72.54 92.56,73.58 92.56,74.92 91.17,76.32 91.17,78 92.06,78.89 93.01,78.89 93.96,79.84 D-SUB50.9
VLED6
  Top 0.203: R6.2 106.28,73.08 106.28,75.14 105.39,76.03 96.5,76.03 95.39,77.14 D-SUB50.25

## Text on the board
tPlace: Developed by: / Ing. Emanuele Alfano
bPlace: Developed by: / Ing. Emanuele Alfano | RP-MOSI | RP-MISO | RP-SCK | RP-SS | RP-ARX/PTX | RP-ATX/PRX | RP-SDA | RP-SCL | AR-MOSI | AR-MISO | AR-SCK | AR-SS | AR-ARX/PTX | AR-ATX/PRX | AR-SDA | AR-SCL
tNames: +12V | Vcc | GND | Gnd | GND | +12V
200bmp: Università degli studi / Tor Vergata
201bmp: Università degli studi / Tor Vergata